# Altium PCB RemoteControl.PcbDoc
Units mil, origin at the board's own origin, x right, y up, seen from the top; angles counter-clockwise.
Board outline 5539.33 x 3011.35 mil, 2 copper layers (Top Layer, Bottom Layer); 63 components, 66 nets, 275 pads, 6 vias.
Unrouted connection lines stored in the file: 157.
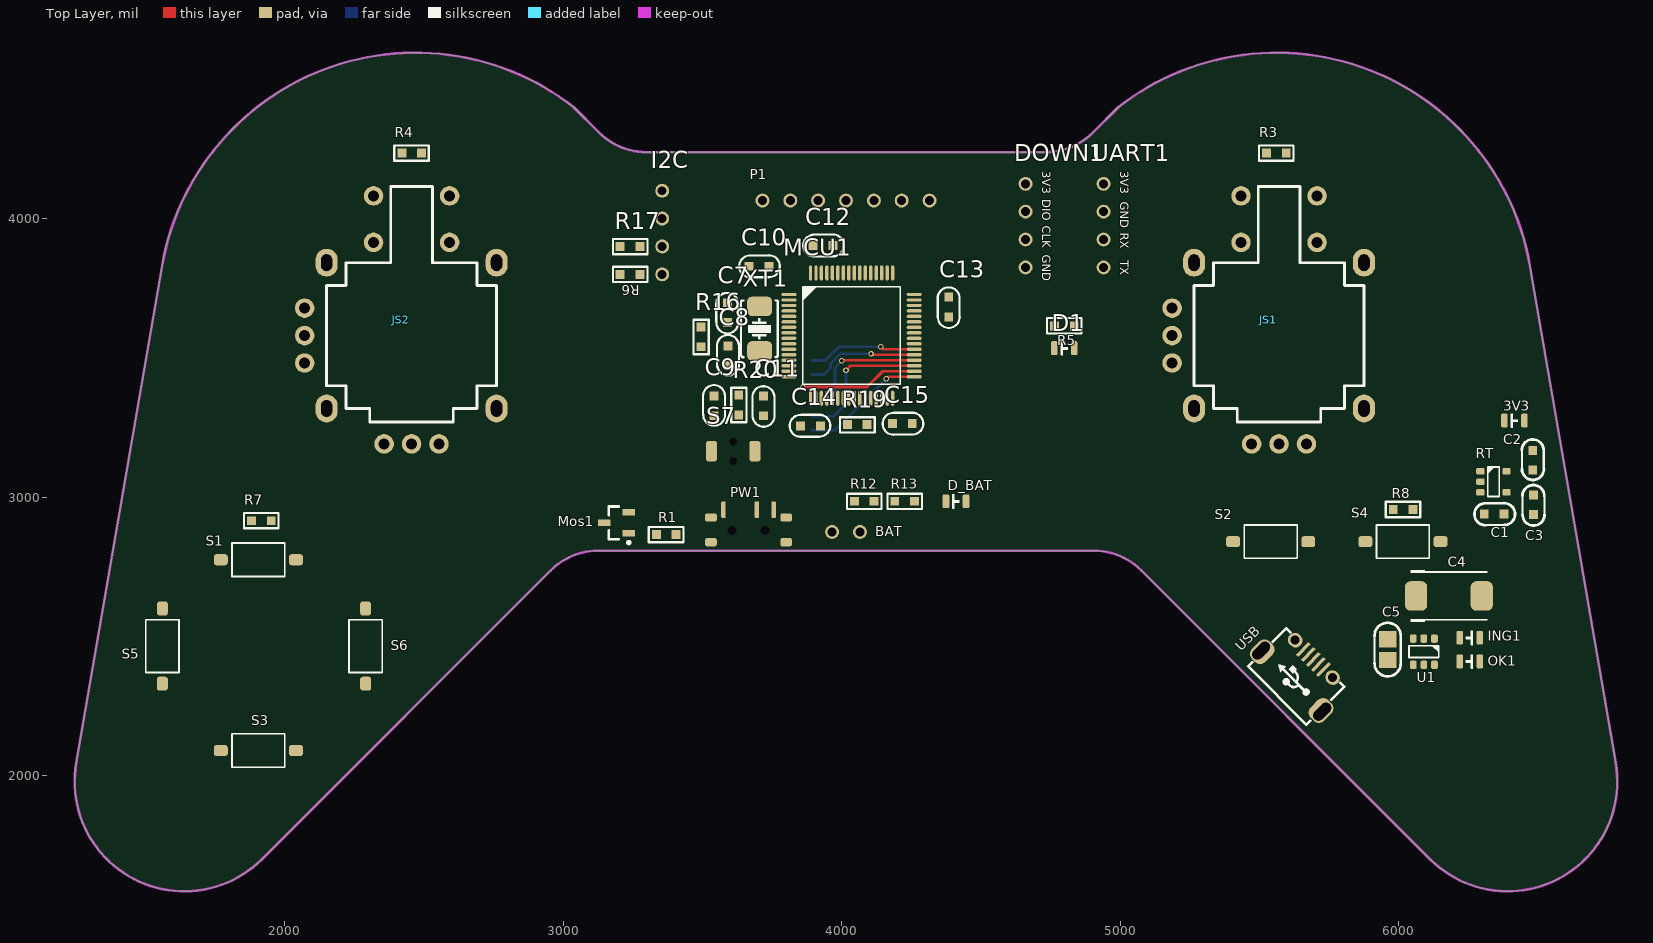
[diagram p0: Top Layer view]
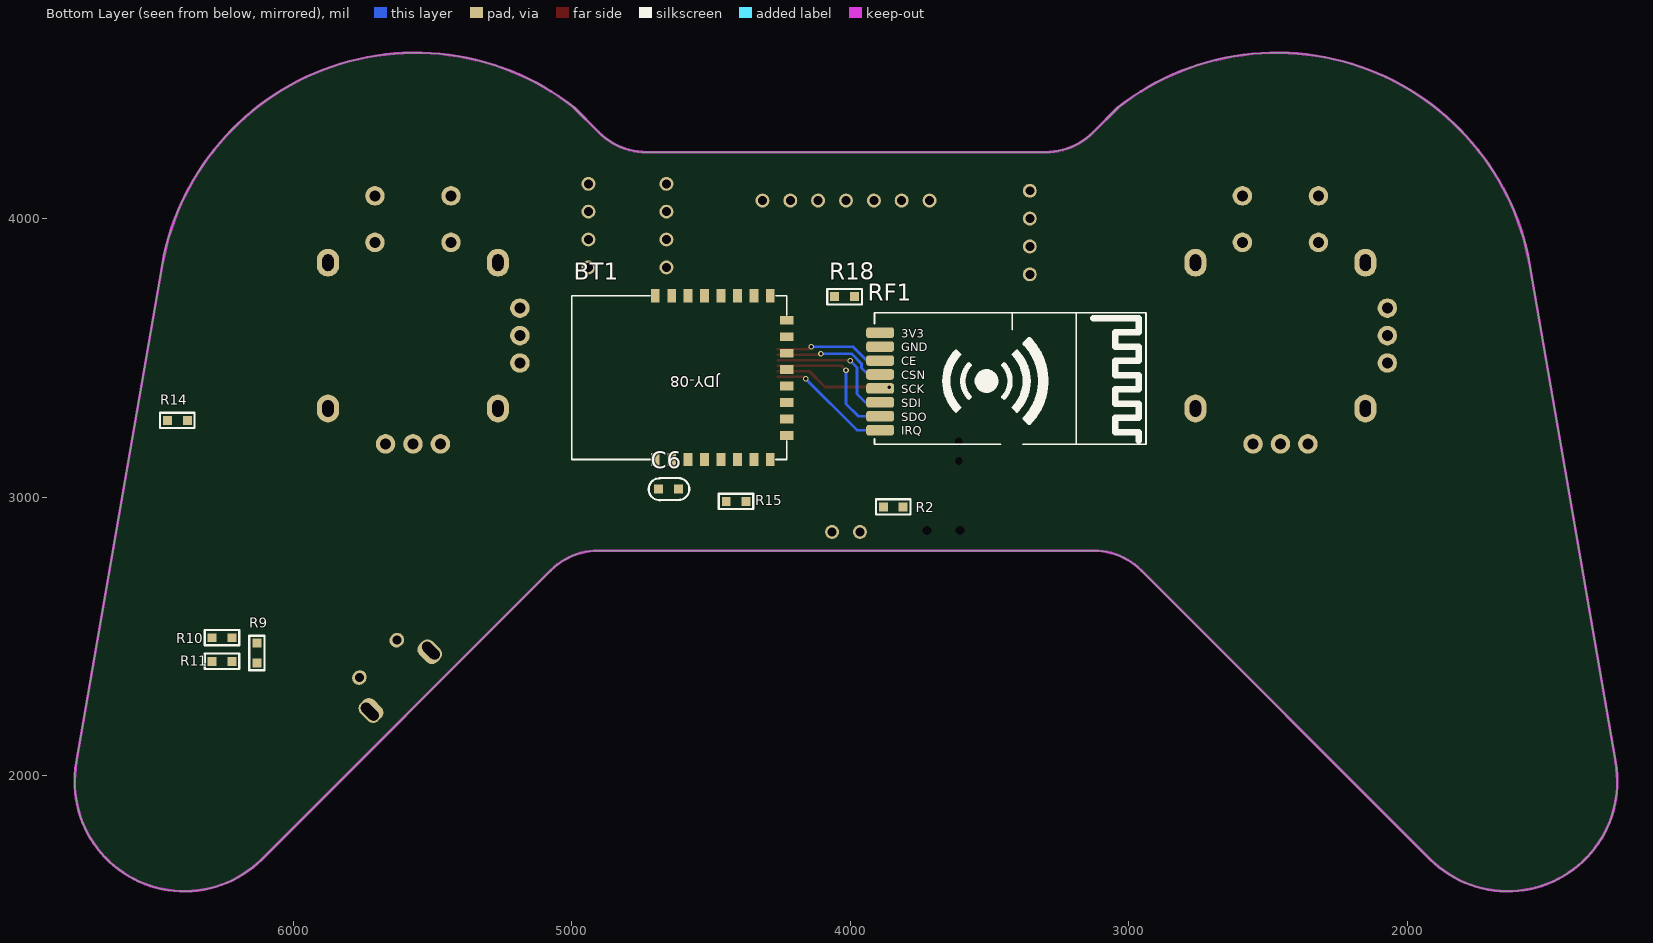
[diagram p1: Bottom Layer view, seen from below]

## Layer stack, top to bottom
Top Solder: solder mask 0.4, Solder Resist, Dk 3.5
Top Layer: signal copper 1.4
Dielectric 1: dielectric 12.6, FR-4, Dk 4.8
Bottom Layer: signal copper 1.4
Bottom Solder: solder mask 0.4, Solder Resist, Dk 3.5

## Board outline
1251.3,2046.48 ccw(c1639.02,1978.11) 1917.4,1699.72 2954.53,2736.85 cw(c3125.24,2566.14) 3125.24,2807.56 4904.76,2807.56 cw(c4904.76,2566.14) 5075.47,2736.85 6112.6,1699.72 ccw(c6390.98,1978.11) 6778.7,2046.48 6470.65,3832.73 ccw(c5561.18,3672.37) 4992.62,4400.1 4901.89,4309.37 cw(c4731.18,4480.08) 4731.18,4238.66 3298.82,4238.66 cw(c3298.82,4480.08) 3128.11,4309.37 3037.38,4400.1 ccw(c2468.82,3672.37) 1559.35,3832.73

## Design rules (kind name [scope] priority, off if disabled: settings)
Clearance [All] p1: gap=6 ignorepadtopadclearanceinfootprint=FALSE
ComponentClearance [All] p1: gap=10 collisioncheckmode=3 verticalgap=100000 showdistances=FALSE
Height [All] p1: minheight=0 maxheight=2000 prefheight=500
PlaneConnect [All] p1: planeconnectstyle=Direct reliefexpansion=20 reliefentries=4 reliefconductorwidth=10 reliefairgap=10
PolygonConnect [All] p1: connectstyle=Direct reliefconductorwidth=10 reliefentries=4 polygonreliefangle="90 Angle" airgapwidth=10
RoutingVias [All] p1: holewidth=28 width=50 viastyle="Through Hole" minholewidth=28 minwidth=50 maxholewidth=28 maxwidth=50
SolderMaskExpansion [All] p1: expansion=4
Width [All] p1: maxlimit=80 minlimit=10 preferedwidth=10 minimp=50.000000 maximp=50.000000 favimp=50.000000
27 further rules are at their usual default settings.

## Classes and differential pairs
component class Core: C7 C8 C9 C10 C11 C12 C13 C14 C15 DOWN1 I2C MCU1 R6 R16 R17 R18 R19 R20 S7 UART1 XT1
component class RemoteControl: 3V3 BAT BT1 C1 C2 C3 C4 C5 C6 D1 D_BAT ING1 JS1 JS2 Mos1 OK1 P1 PW1 R1 R2 R3 R4 R5 R7 R8 R9 R10 R11 R12 R13 R14 R15 RF1 RT S1 S2 S3 S4 S5 S6 U1 USB

## Components (designator, comment, footprint, x,y, rotation, side; value= is the part's Value field where it differs from the comment)
3V3 "LED_0805" LED_0805_RED 6415,3275 r0 top
BAT "HDR1x2_2.54" HDR1X2_2.54_90 4065,2875 r270 top
BT1 "JDY8-cc2541" JDY8 4447.84,3425.06 r0 bottom
C1 "Cap_0603" CAP_0603 6345,2940 r180 top value=1u
C2 "Cap_0603" CAP_0603 6480,3135 r270 top value=0.1u
C3 "Cap_0603" CAP_0603 6485,2970 r90 top value=22n
C4 "Cap_Tan_2917" CAP_TAN_D2917 6180,2645 r0 top value=?F
C5 "Cap_0805" CAP_0805 5959.01,2451.34 r270 top value=?F
C6 "Cap_0603" CAP_0603 4650,3030 r0 bottom value=0.1u
C7 "Cap_0603" CAP_0603 3590,3660 r90 top value=20pf
C8 "Cap_0603" CAP_0603 3590,3510 r270 top value=20pf
C9 "Cap_0603" CAP_0603 3540,3330 r270 top value=0.1u
C10 "Cap_0603" CAP_0603 3705,3830 r180 top value=0.1u
C11 "Cap_0603" CAP_0603 3720,3325 r90 top value=0.1u
C12 "Cap_0603" CAP_0603 3935,3905 r180 top value=0.1u
C13 "Cap_0603" CAP_0603 4385,3680 r90 top value=0.1u
C14 "Cap_0603" CAP_0603 3885,3255 r0 top value=0.1u
C15 "Cap_0603" CAP_0603 4220,3265 r180 top value=0.1u
D1 "LED_0805" LED_0805_YELLOW 4799,3535 r0 top
D_BAT "LED_0805" LED_0805_RED 4410,2985 r0 top
DOWN1 "HDR1x4_2.54" HDR1x4_2.54_180 4660,4125 r0 top
I2C "HDR1x4_2.54" HDR1x4_2.54_180 3355,4100 r0 top
ING1 "LED_0805" LED_0805_RED 6255,2495 r180 top
JS1 "JoyStick" JoyStick 5570,3580 r270 top
JS2 "JoyStick" JoyStick 2455,3580 r270 top
MCU1 "STM32F103RC" LQFP_P0.5_64 4035,3580 r0 top
Mos1 "MOSFET N" Nmos_SOT23 3190.71,2907.6 r180 top
OK1 "LED_0805" LED_0805_GREEN 6255,2410 r180 top
P1 "HDR1x7_2.54" HDR1X7_2.54_180 3715,4065 r90 top
PW1 "SwitchSPDT_2.8x6.6_90" SwitchSPDT_2.8X6.6_90 3665,2880 r0 top
R1 "Res_0603" RES_0603 3371,2947 r0 top value=10K
R2 "Res_0603" RES_0603 3847,2883 r0 bottom value=10K
R3 "Res_0603" RES_0603 5562,4317 r0 top value=10K
R4 "Res_0603" RES_0603 2457,4317 r0 top value=10K
R5 "Res_0603" RES_0603 4801,3697 r0 top value=1K
R6 "Res_0603" RES_0603 3238,3718 r180 top value=10K
R7 "Res_0603" RES_0603 1917,2997 r0 top value=10K
R8 "Res_0603" RES_0603 6017,3037 r0 top value=10K
R9 "Res_0603" RES_0603 6212,2442 r90 bottom value=1.6K
R10 "Res_0603" RES_0603 6254,2577 r180 bottom value=1.6K
R11 "Res_0603" RES_0603 6254,2492 r180 bottom value=1.6K
R12 "Res_0603" RES_0603 4079,2903 r180 top value=10K
R13 "Res_0603" RES_0603 4224,2903 r180 top value=10K
R14 "Res_0603" RES_0603 6414,3357 r180 bottom value=10K
R15 "Res_0603" RES_0603 4408,3066 r180 bottom value=10K
R16 "Res_0603" RES_0603 3413,3577 r90 top value=1M
R17 "Res_0603" RES_0603 3238,3818 r180 top value=10K
R18 "Res_0603" RES_0603 4022,3638 r0 bottom value=10K
R19 "Res_0603" RES_0603 4054,3178 r180 top value=10K
R20 "Res_0603" RES_0603 3712,3329 r270 top value=10K
RF1 "NRF2401_优信" nrf24l01_youxin 3515,3410 r180 bottom
RT "RT9193" SOT23-5 6340,3055 r0 top
S1 "ButtonTACT_3x6x2.5_180" ButtonTACT_3x6x2.5_180 1905,2775 r180 top
S2 "ButtonTACT_3x6x2.5_180" ButtonTACT_3x6x2.5_180 5540,2840 r180 top
S3 "ButtonTACT_3x6x2.5_180" ButtonTACT_3x6x2.5_180 1905,2090 r180 top
S4 "ButtonTACT_3x6x2.5_180" ButtonTACT_3x6x2.5_180 6015,2840 r180 top
S5 "ButtonTACT_3x6x2.5_180" ButtonTACT_3x6x2.5_180 1560,2465 r90 top
S6 "ButtonTACT_3x6x2.5_180" ButtonTACT_3x6x2.5_180 2290,2465 r270 top
S7 "ButtonTACT_3x4x2_180" ButtonTACT_3x4x2_180H 3610,3165 r0 top
U1 "TP4059" SOT23-6 6090,2445 r270 top
UART1 "HDR1x4_2.54" HDR1x4_2.54_180 4940,4125 r0 top
USB "USB_Micro" USB_Micro-AB 5622.38,2346.19 r135 top
XT1 "XTAL_5032_2P" XT_5032_2 3705,3605 r90 top value=8M

## Footprints (in the part's own frame and the unit in brackets; to place one, negate y for a bottom-side part, rotate by r counter-clockwise, add the part's x,y. Pads: shape width x height; smd on the part's side, far side on the other; paste and mask are expansions set on the pad)
ButtonTACT_3x4x2_180H [mil]
  round 0 hole 28: 0(0,-35) 0(0,35)
  rrect50% 40x74 smd: 1(-78,0) 2(78,0)
  body extent -79,-49 79,49, height 63
ButtonTACT_3x6x2.5_180 [mil]
  rrect50% 50x40 smd: 1(-135,0) 2(135,0)
  silkscreen extent -95,-60 95,60, body extent -157,-71 157,71, height 94
CAP_0603 [mil]
  rect 32x32 smd: 1(-33,1) 2(38,1)
  silkscreen extent -72,-38 73,41, body extent -33,-15 30,17, height 31
CAP_0805 [mm]
  rect 1.5x1.6 smd: 1(-0.977,0.025) 2(0.923,0.025)
  silkscreen extent -2.48,-1.17 2.42,1.23, body extent -1.08,-0.64 0.92,0.62, height 1
CAP_TAN_D2917 [mil]
  rrect50% 80x106 smd: 1(-118,0) 2(118,0)
  silkscreen extent -138,-92 138,92, body extent -150,-78 150,78, height 122
HDR1X2_2.54_90 [mil]
  round 50 hole 32: 1(0,0) 2(0,-100)
  body extent -15,-146 424,46, height 99
HDR1x4_2.54_180 [mil]
  round 50 hole 32: 1(0,0) 2(0,-100) 3(0,-200) 4(0,-300)
  body extent -49,-350 49,50, height 323
HDR1X7_2.54_180 [mil]
  round 50 hole 32: 1(0,0) 2(0,-100) 3(0,-200) 4(0,-300) 5(0,-400) 6(0,-500) 7(0,-600)
  body extent -49,-650 49,50, height 323
JDY8 [mm]
  rect 0.8x1.2 smd: 1(6.405,7.367) 2(4.905,7.367) 3(3.405,7.367) 4(1.905,7.367) 5(0.405,7.367) 6(-1.095,7.367) 7(-2.595,7.367) 8(-4.095,7.367) 17(-4.095,-7.568) 18(-2.595,-7.568) 19(-1.095,-7.568) 20(0.405,-7.568) 21(1.905,-7.568) 22(3.405,-7.568) 23(4.905,-7.568) 24(6.405,-7.568)
  rect 1.2x0.8 smd: 9(-5.595,5.165) 10(-5.595,3.665) 11(-5.595,2.165) 12(-5.595,0.665) 13(-5.595,-0.835) 14(-5.595,-2.335) 15(-5.595,-3.835) 16(-5.595,-5.335)
  silkscreen extent -5.6,-7.57 14.02,7.37
JoyStick [mil]
  oval 100x80 hole 40 slot 60 at 0 deg: 0(-261.81,305.12) 0(-261.81,-305.12) 0(261.81,305.12) 0(261.81,-305.12)
  round 70 hole 39.37: 1(-98.43,-383.86) 2(0,-383.86) 3(98.43,-383.86) 4(388.86,-98.43) 5(388.86,0) 6(388.86,98.43) 7(-501.97,136.57) 8(-334.8,136.57) 9(-501.97,-136.57) 10(-334.8,-136.57)
  silkscreen extent -535,-305 310,305, body extent -592,-518 518,518, height 1126
LED_0805_GREEN [mil]
  rrect50% 24x50 smd: 1(-36,0) 2(36,0)
  silkscreen extent -12,-24 12,24, body extent -40,-25 40,25, height 43
LED_0805_RED [mil]
  rrect50% 24x50 smd: 1(-36,0) 2(36,0)
  silkscreen extent -12,-24 12,24, body extent -40,-25 40,25, height 43
LED_0805_YELLOW [mil]
  rrect50% 24x50 smd: 1(-36,0) 2(36,0)
  silkscreen extent -12,-24 12,24, body extent -40,-25 40,25, height 43
LQFP_P0.5_64 [mil]
  oval 54x12 smd: 1(-225,147.64) 2(-225,127.95) 3(-225,108.27) 4(-225,88.58) 5(-225,68.9) 6(-225,49.21) 7(-225,29.53) 8(-225,9.84) 9(-225,-9.84) 10(-225,-29.53) 11(-225,-49.21) 12(-225,-68.9) 13(-225,-88.58) 14(-225,-108.27) 15(-225,-127.95) 16(-225,-147.64) 33(225,-147.64) 34(225,-127.95) 35(225,-108.27) 36(225,-88.58) 37(225,-68.9) 38(225,-49.21) 39(225,-29.53) 40(225,-9.84) 41(225,9.84) 42(225,29.53) 43(225,49.21) 44(225,68.9) 45(225,88.58) 46(225,108.27) 47(225,127.95) 48(225,147.64)
  oval 12x54 smd: 17(-147.64,-225) 18(-127.95,-225) 19(-108.27,-225) 20(-88.58,-225) 21(-68.9,-225) 22(-49.21,-225) 23(-29.53,-225) 24(-9.84,-225) 25(9.84,-225) 26(29.53,-225) 27(49.21,-225) 28(68.9,-225) 29(88.58,-225) 30(108.27,-225) 31(127.95,-225) 32(147.64,-225) 49(147.64,225) 50(127.95,225) 51(108.27,225) 52(88.58,225) 53(68.9,225) 54(49.21,225) 55(29.53,225) 56(9.84,225) 57(-9.84,225) 58(-29.53,225) 59(-49.21,225) 60(-68.9,225) 61(-88.58,225) 62(-108.27,225) 63(-127.95,225) 64(-147.64,225)
  silkscreen extent -175,-175 175,175, body extent -236,-236 236,236, height 59
Nmos_SOT23 [mm]
  rect 1.15x0.6 smd: D(1.125,0) G(-1.125,0.95) S(-1.125,-0.95)
  silkscreen extent -1.25,-1.5 0.7,1.92, body extent -0.7,-1.5 0.7,1.5, height 1.14
nrf24l01_youxin [mil]
  rrect50% 100x38 smd: 1(-377.57,180.39) 2(-377.57,130.39) 3(-377.57,80.39) 4(-377.57,30.39) 5(-377.57,-19.61) 6(-377.57,-69.61) 7(-377.57,-119.61) 8(-377.57,-169.61)
  silkscreen extent -398,-221 577,252, body extent -383,-235 582,265, height 46
RES_0603 [mil]
  rect 32x32 smd: 1(-37,-82) 2(34,-82)
  silkscreen extent -64,-109 60,-54, body extent -31,-98 31,-66, height 18
SOT23-5 [mil]
  rrect50% 30x24 smd: 1(-47,38) 2(-47,0) 3(-47,-38) 4(47,-38) 5(47,38)
  silkscreen extent -21,-53 21,53, body extent -55,-57 55,57, height 57
SOT23-6 [mil]
  rrect50% 30x24 smd: 1(-47,38) 2(-47,0) 3(-47,-38) 4(47,-38) 5(47,0) 6(47,38)
  silkscreen extent -21,-53 21,53, body extent -55,-57 55,57, height 57
SwitchSPDT_2.8X6.6_90 [mil]
  rrect50% 42x30 smd: 0(-135,-42) 0(-135,47) 0(135,-42) 0(135,47)
  round 10 hole 31.5: 0(-59.06,0) 0(59.06,0)
  rrect50% 16x60 smd: 1(90,75) 2(30,75) 3(-90,75)
  body extent -152,-111 151,86, height 55
USB_Micro-AB [mil]
  rrect80% 68x90 hole 37 slot 75 at 90 deg copper offset 6,0 mask+0: 0(-155,10)
  oval 54x50 hole 32 mask+0: 0(-95,-103) 0(95,-103)
  rrect80% 68x90 hole 37 slot 75 at 90 deg copper offset -6,0 mask+0: 0(155,10)
  rrect50% 12x64 smd: 1(51.18,-100) 2(25.59,-100) 3(0,-100) 4(-25.59,-100) 5(-51.18,-100)
  silkscreen extent -151,-113 151,86, body extent -161,-109 161,104, height 108
XT_5032_2 [mil]
  rrect50% 70x90 smd: 1(-80,0) 2(80,0)
  silkscreen extent -104,-68 104,68, body extent -98,-63 98,63, height 39

## Part data
3V3 D1 D_BAT ING1 OK1: "LED"
BAT DOWN1 I2C UART1: "Header"
C1 C2 C3 C4 C5 C6 C7 C8 C9 C10 C11 C12 C13 C14 C15: "Capacitor"
MCU1: "MCU"
Mos1: "MOS SOT23"
P1: library part HDR1x7_2.54T, "Header"
PW1: "Switch"
R1 R2 R3 R4 R5 R6 R7 R8 R9 R10 R11 R12 R13 R14 R15 R16 R17 R18 R19 R20: "Resistor"
RT: "Power"
S1 S2 S3 S4 S5 S6 S7: "Button"
USB: "USB"
XT1: "Crystal Oscillator"

## Via types
v1: diameter 20, hole 12, Top Layer to Bottom Layer, 6 vias

## Nets (pads, with @x,y where several pads share a name; then routed paths per layer and width w, separated by ;. In a path a pad name is that pad's centre, name@x,y a point inside that pad or via, vN(x,y) a via of type N, cw(c..) or ccw(c..) an arc to the next point about the centre after c; other vN are vias at no path point)
3V3: BT1.1 C2.2 C6.2 C10.2 C11.2 C12.2 C13.2 C14.2 C15.2 DOWN1.1 I2C.1 JS1.1 JS1.6 JS2.1 JS2.6 MCU1.1 MCU1.13 MCU1.19 MCU1.32 MCU1.48 MCU1.64 P1.2 R3.2 R4.2 R6.2 R7.2 R8.2 R14.1 R17.2 R20.1 RF1.1 RT.5
AD_LEFT1: JS2.5 MCU1.21
AD_LEFT2: JS2.2 MCU1.20
AD_RIGHT1: JS1.5 MCU1.26
AD_RIGHT2: JS1.2 MCU1.27
BAT_V: MCU1.25 R12.1 R13.2
BGND: BAT.2 C4.2 C5.1 Mos1.S R2.2 R9.2 U1.2 USB.0 USB.5
BOOT0: MCU1.60 R18.1
BOOT1: MCU1.28 R19.1
CE: MCU1.38 RF1.3 | length 391.8
  Top Layer w10: v1(4140,3540) 4149.21,3530.79 MCU1.38
  Bottom Layer w10: RF1.3 3940.39,3490.39 3990,3540 v1(4140,3540)
CONNECTED: BT1.6 MCU1.41
CSN: MCU1.37 RF1.4 | length 408.6
  Top Layer w10: v1(4105,3515) 4108.9,3511.1 MCU1.37
  Bottom Layer w10: RF1.4 3935.39,3440.39 3959,3464 3959,3478.7 3995.3,3515 v1(4105,3515)
CSN_OLED: MCU1.52 P1.7
DC: MCU1.53 P1.6
GND: 3V3.2 BT1.24 C1.1 C2.1 C3.1 C6.1 C7.1 C8.1 C9.1 C10.1 C11.1 C12.1 C13.1 C14.1 C15.1 D1.2 D_BAT.2 DOWN1.4 I2C.2 JS1.3 JS1.4 JS1.8 JS1.10 JS2.3 JS2.4 JS2.8 JS2.10 MCU1.12 MCU1.18 MCU1.31 MCU1.47 MCU1.63 Mos1.D P1.1 R13.1 R18.2 R19.2 RF1.2 RT.2 S7.2 UART1.2
IRQ: MCU1.33 RF1.8 | length 446.9
  Top Layer w10: v1(4160,3425) 4167.36,3432.36 MCU1.33
  Bottom Layer w10: RF1.8 3975.39,3240.39 v1(4160,3425)
JDY_RX: BT1.20 MCU1.29
JDY_TX: BT1.19 MCU1.30
JOY_LEFT_KEY: JS2.9 MCU1.62 R4.1
JOY_RIGHT_KEY: JS1.9 MCU1.51 R3.1
KEY_CENCEL: MCU1.40 S4.2
KEY_DOWN: MCU1.17 S3.2
KEY_LEFT: MCU1.14 S5.2
KEY_OK: MCU1.39 S2.2
KEY_RIGHT: MCU1.16 S6.2
KEY_UP: MCU1.15 S1.2
MISO: MCU1.35 RF1.7 | length 512.8
  Top Layer w10: v1(4015,3455) 4031.73,3471.73 MCU1.35
  Bottom Layer w10: RF1.7 3970.39,3290.39 4015,3335 v1(4015,3455)
MOSI: MCU1.36 P1.4 RF1.6 | length 485.6
  Top Layer w10: v1(4000,3490) 4001.42,3491.42 MCU1.36
  Bottom Layer w10: RF1.6 3945.39,3340.39 3975,3370 3975,3465 v1(4000,3490)
Net3V3_1: 3V3.1 R14.2
NetBT1_17: BT1.17 R5.2
NetC3_2: C3.2 RT.4
NetC7_2: C7.2 MCU1.5 R16.2 XT1.2
NetC8_2: C8.2 MCU1.6 R16.1 XT1.1
NetD1_1: D1.1 R5.1
NetD_BAT_1: D_BAT.1 R15.2
NetING1_1: ING1.1 R10.1
NetING1_2: ING1.2 U1.1
NetMos1_G: Mos1.G R1.1
NetOK1_1: OK1.1 R11.1
NetPW1_1: PW1.1 R2.1
NetR7_1: R7.1 S1.1 S3.1 S5.1 S6.1
NetR8_1: R8.1 S2.1 S4.1
NetR9_1: R9.1 U1.6
NRST: C9.2 MCU1.7 R20.2 S7.1
PA6: MCU1.22
PA7: MCU1.23
PA15: MCU1.50
PB3: MCU1.55
PB4: MCU1.56
PB5: MCU1.57
PB8: MCU1.61
PC4: MCU1.24
RES: MCU1.54 P1.5
RXD: MCU1.43 UART1.3
SCL: I2C.3 MCU1.58 R17.1
SCLK: MCU1.34 P1.3 RF1.5 | length 423.6
  Top Layer w10: v1(3860,3395) 4090,3395 4147.05,3452.05 MCU1.34
SDA: I2C.4 MCU1.59 R6.1
STDBY: OK1.2 U1.5
SWCLK: DOWN1.3 MCU1.49
SWDIO: DOWN1.2 MCU1.46
TXD: MCU1.42 UART1.4
VBAT: BAT.1 C1.2 C4.1 PW1.3 R12.2 R15.1 RT.1 RT.3 U1.3 UART1.1
VIN: PW1.2 R1.2
VUSB: C5.2 R10.2 R11.2 U1.4 USB.1
WP: MCU1.44
WQCS: MCU1.45
pads on no net: BT1.2 BT1.3 BT1.4 BT1.5 BT1.7 BT1.8 BT1.9 BT1.10 BT1.11 BT1.12 BT1.13 BT1.14 BT1.15 BT1.16 BT1.18 BT1.21 BT1.22 BT1.23 JS1.0 JS1.7 JS2.0 JS2.7 MCU1.2 MCU1.3 MCU1.4 MCU1.8 MCU1.9 MCU1.10 MCU1.11 PW1.0 S7.0 USB.2 USB.3 USB.4

## Keep-outs
Keep-Out Layer:
  the board outline again, w10

## Other copper
Top Layer:
  pour cut-out: 3192.5,3675 3437.5,3675 3432.5,3670 3432.5,3190 3197.5,3190 3192.5,3185
Bottom Layer:
  pour cut-out: 3192.5,3667.5 3197.5,3662.5 3442.5,3662.5 3442.5,3197.5 3432.5,3187.5 3427.5,3192.5 3197.5,3192.5

## Silkscreen, mask and mechanical layers (free items; w line width, h text height)
Top Overlay:
  text "3V3" at 4720,4170 h30 r270
  text "3V3" at 5000,4170 h30 r270
  text "DIO" at 4720,4070 h30 r270
  text "GND" at 5000,4060 h30 r270
  text "CLK" at 4720,3975 h30 r270
  text "RX" at 5000,3950 h30 r270
  text "GND" at 4720,3870 h30 r270
  text "TX" at 5000,3850 h30 r270

## Text inside footprints (layer, text, board x,y; h text height)
BT1: Bottom Overlay "JDY-08" at 4468.94,3434.38 h39.37 r180
RF1: Bottom Overlay "GND" at 3816.04,3523.3 h30; Bottom Overlay "IRQ" at 3816.04,3223.22 h30; Bottom Overlay "SDO" at 3816.04,3273.22 h30; Bottom Overlay "SDI" at 3816.04,3323.22 h30; Bottom Overlay "SCK" at 3816.04,3373.22 h30; Bottom Overlay "CSN" at 3816.04,3423.22 h30; Bottom Overlay "3V3" at 3816.04,3572.81 h30; Bottom Overlay "CE" at 3816.04,3473.22 h30